# EAGLE board SNES and NES Dumper (EAGLE 9.6.2)
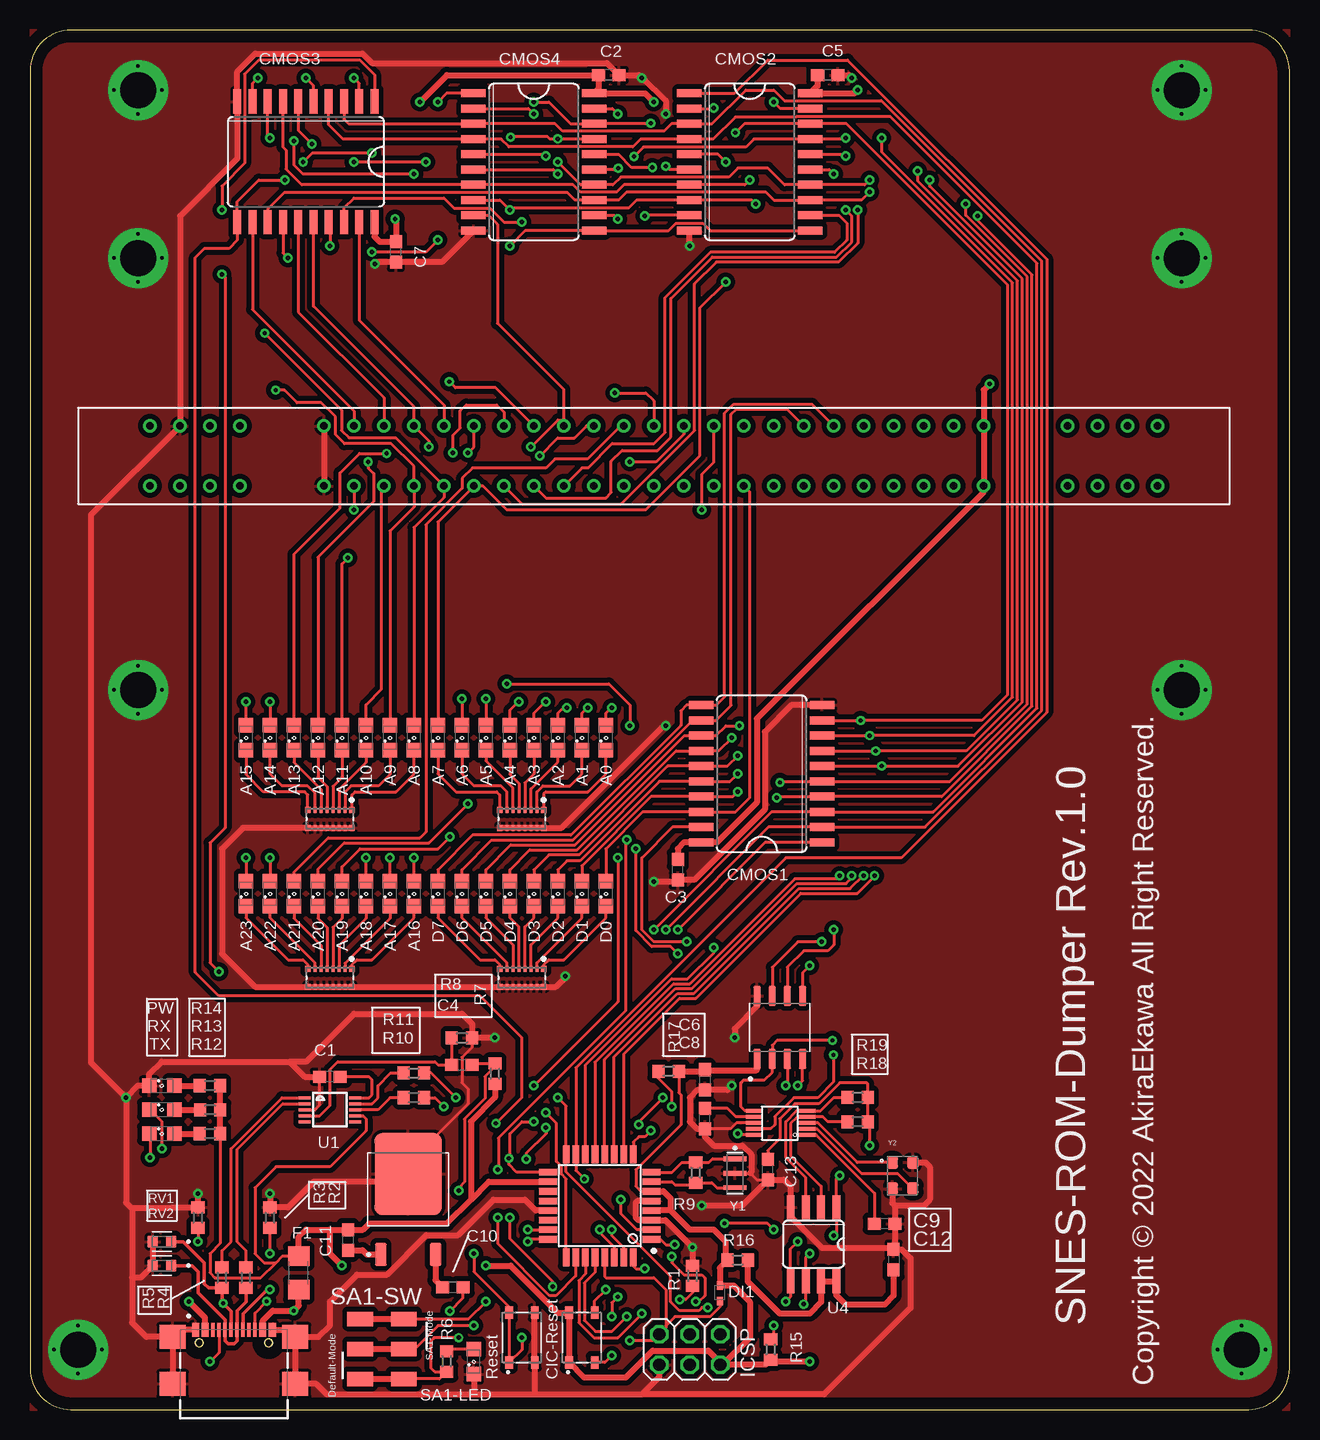
[diagram p0: board, top side]
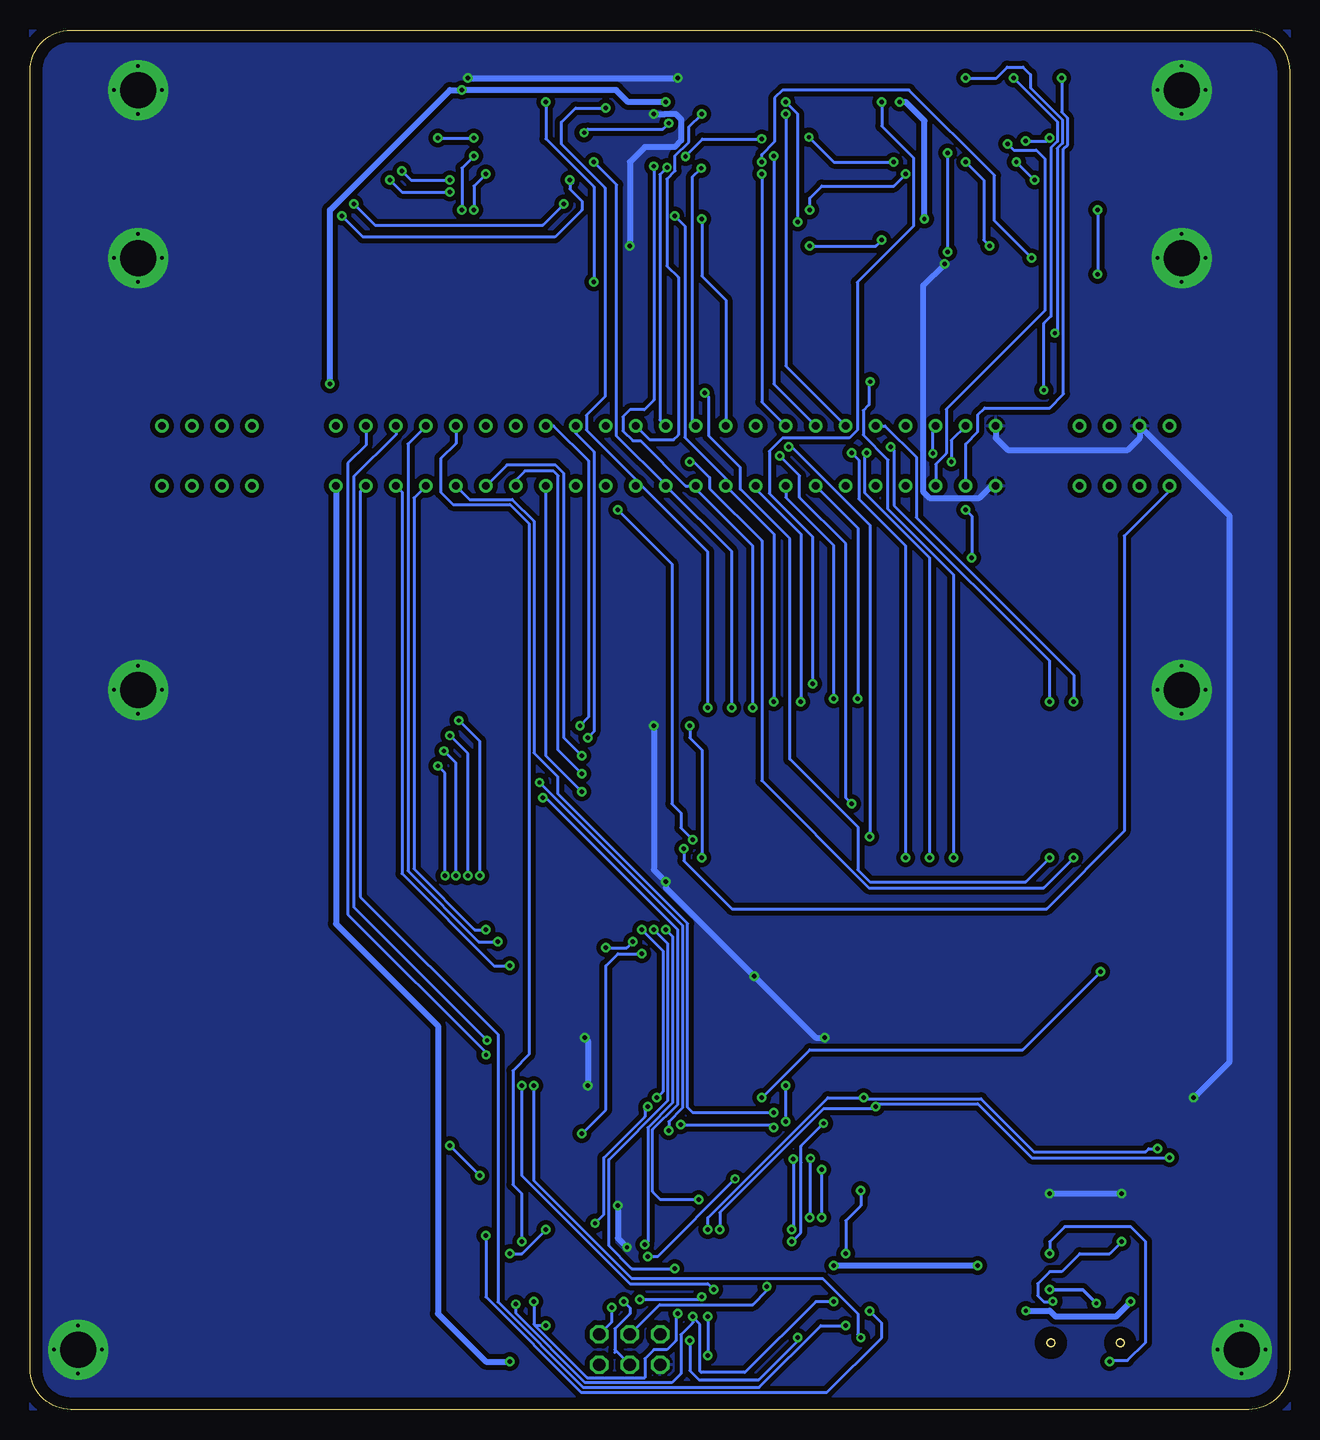
[diagram p1: board, bottom side, seen from below]

Size 105 x 115 mm. Coordinates in mm from the lower left corner, seen from the top.
Outline: 13.79,5.54 arc172 14.44,5.54 14.44,5.58 arc172 13.79,5.58 13.79,5.54
Outline: 19.57,5.54 arc172 20.21,5.54 20.21,5.58 arc172 19.57,5.58 19.57,5.54
Outline: 0,111.59 0,3.41 arc90 3.41,0 101.59,0 101.88,0.01 arc85 105,3.41 105,111.59 104.99,111.88 arc85 101.59,115 3.41,115 3.12,114.99 arc85 0,111.59
Copper layers (1*16): Top 0.035mm / dielectric 1.5mm / Bottom 0.035mm
Design rules "default *": minimum track width 6mil, minimum drill 0.35mm, track to track 6mil, track to pad 6mil, pad to pad 6mil, via to via 6mil, smd to smd 6mil, copper to edge 40mil, drill to drill 6mil, minimum pad ring 10mil, minimum via ring 8mil, stop-mask expansion 4mil, vias tented up to drill 0.4mm, thermal gap 10mil
Holes 0.65 mm at 14.11,5.56 19.89,5.56

## Footprints (pad centres in the part's own frame; a part is rotated, then mirrored left to right if it is on the bottom)
SML0805 = smd 1.2 x 1.2: A 1.05,0; C -1.05,0
C0603 = smd 1.1 x 1: 1 -0.85,0; 2 0.85,0
SO20W = smd 0.66 x 2.032: A1 -4.445,-5.029; A2 -3.175,-5.029; A3 -1.905,-5.029; A4 -0.635,-5.029; A5 0.635,-5.029; A6 1.905,-5.029; A7 3.175,-5.029; A8 4.445,-5.029; B1 -3.175,5.029; B2 -1.905,5.029; B3 -0.635,5.029; B4 0.635,5.029; B5 1.905,5.029; B6 3.175,5.029; B7 4.445,5.029; B8 5.715,5.029; DIR -5.715,-5.029; G -4.445,5.029; GND 5.715,-5.029; VCC -5.715,5.029
SO20W' = smd 0.66 x 2.032: CK 5.715,5.029; D1 -3.175,-5.029; D2 -1.905,-5.029; D3 1.905,-5.029; D4 3.175,-5.029; D5 3.175,5.029; D6 1.905,5.029; D7 -1.905,5.029; D8 -3.175,5.029; G -5.715,-5.029; GND 5.715,-5.029; Q1 -4.445,-5.029; Q2 -0.635,-5.029; Q3 0.635,-5.029; Q4 4.445,-5.029; Q5 4.445,5.029; Q6 0.635,5.029; Q7 -0.635,5.029; Q8 -4.445,5.029; VCC -5.715,5.029
CON = drill 0.6: 1 0,84; 2 0,81.5; 3 0,79; 4 0,76.5; 5 0,69.5; 6 0,67; 7 0,64.5; 8 0,62; 9 0,59.5; 10 0,57; 11 0,54.5; 12 0,52; 13 0,49.5; 14 0,47; 15 0,44.5; 16 0,42; 17 0,39.5; 18 0,37; 19 0,34.5; 20 0,32; 21 0,29.5; 22 0,27; 23 0,24.5; 24 0,22; 25 0,19.5; 26 0,17; 27 0,14.5; 28 0,7.5; 29 0,5; 30 0,2.5; 31 0,0; 32 5,84; 33 5,81.5; 34 5,79; 35 5,76.5; 36 5,69.5; 37 5,67; 38 5,64.5; 39 5,62; 40 5,59.5; 41 5,57; 42 5,54.5; 43 5,52; 44 5,49.5; 45 5,47; 46 5,44.5; 47 5,42; 48 5,39.5; 49 5,37; 50 5,34.5; 51 5,32; 52 5,29.5; 53 5,27; 54 5,24.5; 55 5,22; 56 5,19.5; 57 5,17; 58 5,14.5; 59 5,7.5; 60 5,5; 61 5,2.5; 62 5,0
SOD523 = smd 0.7 x 0.5: A 0.7,0; C -0.6,0
1206 = smd 1.6 x 1.8: 1 -1.4,0; 2 1.4,0
2X03 = drill 1.016 octagon: 1 -2.54,-1.27; 2 -2.54,1.27; 3 0,-1.27; 4 0,1.27; 5 2.54,-1.27; 6 2.54,1.27
GCT_USB4110-GF-A_REVB = smd 0.6 x 1.15: A1/B12 -3.2,1.075; A4/B9 -2.4,1.075; B1/A12 3.2,1.075; B4/A9 2.4,1.075 | smd 0.3 x 1.15: A5 -1.25,1.075; A6 -0.25,1.075; A7 0.25,1.075; A8 1.25,1.075; B5 1.75,1.075; B6 0.75,1.075; B7 -0.75,1.075; B8 -1.75,1.075 | smd 2.18 x 2: S1 -5.11,0.5; S2 5.11,0.5; S3 -5.11,-3.43; S4 5.11,-3.43 | hole 0.65: -2.89,0; 2.89,0
R0603 = smd 1 x 1.1: 1 -0.85,0; 2 0.85,0
PANASONIC_EXB-2HV101JV_0 = smd 0.425 x 0.5: 1 -1.837,-0.75; 8 1.837,-0.75; 9 1.837,0.75; 16 -1.837,0.75 | smd 0.25 x 0.5: 2 -1.25,-0.75; 3 -0.75,-0.75; 4 -0.25,-0.75; 5 0.25,-0.75; 6 0.75,-0.75; 7 1.25,-0.75; 10 1.25,0.75; 11 0.75,0.75; 12 0.25,0.75; 13 -0.25,0.75; 14 -0.75,0.75; 15 -1.25,0.75
VARC1608X56N = smd 0.87 x 1.02: 1 -0.78,0; 2 0.78,0
SW_SKRPACE010 = smd 1.05 x 0.65: 1 -2.075,1.075; 2 2.075,1.075; 3 -2.075,-1.075; 4 2.075,-1.075
ALPS_SSSS213202 = smd 1.2 x 2.15: P$1 0,0; P$2 2.5,0; P$3 5,0; P$4 5,3.65; P$5 2.5,3.65; P$6 0,3.65
MSOP10 = smd 1 x 0.25: 1 -2.113,1; 2 -2.113,0.5; 3 -2.113,0; 4 -2.113,-0.5; 5 -2.113,-1; 6 2.113,-1; 7 2.113,-0.5; 8 2.113,0; 9 2.113,0.5; 10 2.113,1
QFP80P900X900X120-32N = smd 1.5 x 0.55: 1 -4.3,2.8; 2 -4.3,2; 3 -4.3,1.2; 4 -4.3,0.4; 5 -4.3,-0.4; 6 -4.3,-1.2; 7 -4.3,-2; 8 -4.3,-2.8; 17 4.3,-2.8; 18 4.3,-2; 19 4.3,-1.2; 20 4.3,-0.4; 21 4.3,0.4; 22 4.3,1.2; 23 4.3,2; 24 4.3,2.8 | smd 0.55 x 1.5: 9 -2.8,-4.3; 10 -2,-4.3; 11 -1.2,-4.3; 12 -0.4,-4.3; 13 0.4,-4.3; 14 1.2,-4.3; 15 2,-4.3; 16 2.8,-4.3; 25 2.8,4.3; 26 2,4.3; 27 1.2,4.3; 28 0.4,4.3; 29 -0.4,4.3; 30 -1.2,4.3; 31 -2,4.3; 32 -2.8,4.3
DPAK228P968X238-4N = smd 0.96 x 1.9: 1 -2.28,-4.59; 3 2.28,-4.59 | smd 5.63 x 6.84: 2 0,2.12
SOIC-8 = smd 0.66 x 2.032: 1 -1.905,-3.073; 2 -0.635,-3.073; 3 0.635,-3.073; 4 1.905,-3.073; 5 1.905,3.073; 6 0.635,3.073; 7 -0.635,3.073; 8 -1.905,3.073
SOIC127P600X175-8N = smd 1.65 x 0.61: 1 -2.63,1.905; 2 -2.63,0.635; 3 -2.63,-0.635; 4 -2.63,-1.905; 5 2.63,-1.905; 6 2.63,-0.635; 7 2.63,0.635; 8 2.63,1.905
SI5351A-B-GTR = smd 1.4 x 0.3: CLK0 4.4,2; CLK1 4.4,1.5; CLK2 4.4,0; GND 4.4,1; SCL 0,0.5; SDA 0,0; VDD 0,2; VDDO 4.4,0.5; XA 0,1.5; XB 0,1
OSC_CSTCE16M0V53-R0 = smd 0.4 x 1.9: 1 -1.2,0; 2 0,0; 3 1.2,0
OSCSC320X250X100N = smd 0.98 x 1.1: 1 -0.85,1.1; 2 -0.85,-1.1; 3 0.85,-1.1; 4 0.85,1.1

## Placement (x,y rotation side)
A0  YELLOW  [SML0805]  48,56 90 top
A1  YELLOW  [SML0805]  46,56 90 top
A2  YELLOW  [SML0805]  44,56 90 top
A3  YELLOW  [SML0805]  42,56 90 top
A4  YELLOW  [SML0805]  40,56 90 top
A5  YELLOW  [SML0805]  38,56 90 top
A6  YELLOW  [SML0805]  36,56 90 top
A7  YELLOW  [SML0805]  34,56 90 top
A8  YELLOW  [SML0805]  32,56 90 top
A9  YELLOW  [SML0805]  30,56 90 top
A10  YELLOW  [SML0805]  28,56 90 top
A11  YELLOW  [SML0805]  26,56 90 top
A12  YELLOW  [SML0805]  24,56 90 top
A13  YELLOW  [SML0805]  22,56 90 top
A14  YELLOW  [SML0805]  20,56 90 top
A15  YELLOW  [SML0805]  18,56 90 top
A16  YELLOW  [SML0805]  32,43 90 top
A17  YELLOW  [SML0805]  30,43 90 top
A18  YELLOW  [SML0805]  28,43 90 top
A19  YELLOW  [SML0805]  26,43 90 top
A20  YELLOW  [SML0805]  24,43 90 top
A21  YELLOW  [SML0805]  22,43 90 top
A22  YELLOW  [SML0805]  20,43 90 top
A23  YELLOW  [SML0805]  18,43 90 top
C1  0.1u  [C0603]  25,27.75 180 top
C2  0.1u  [C0603]  48.25,111.25 180 top
C3  0.1u  [C0603]  54,45 90 top
C4  0.1u  [C0603]  36,28.75 0 top
C5  0.1u  [C0603]  66.51,111.25 180 top
C6  100n  [C0603]  56.25,27.49 270 top
C7  0.1u  [C0603]  30.5,96.5 90 top
C8  0.1u  [C0603]  56.25,24.25 90 top
C9  0.1u  [C0603]  71.25,15.49 180 top
C10  2.2u  [C0603]  35.25,10.2 0 top
C11  0.33u  [C0603]  26.5,14.13 270 top
C12  0.1u  [C0603]  71.99,12.5 270 top
C13  0.1u  [C0603]  61.5,20 90 top
CIC_START  GREEN  [SML0805]  36.99,4 90 top
CMOS1  TC74HC245AF  [SO20W]  61,53 90 top
CMOS2  TC74HC377AF  [SO20W']  60,104 270 top
CMOS3  TC74HC377AF  [SO20W']  23,104.01 180 top
CMOS4  TC74HC377AF  [SO20W']  42,104 270 top
CONNECTOR1  SNES-CARD-CONNECTOR  [CON]  94,77 90 top
D0  YELLOW  [SML0805]  48,43 90 top
D1  YELLOW  [SML0805]  46,43 90 top
D2  YELLOW  [SML0805]  44,43 90 top
D3  YELLOW  [SML0805]  42,43 90 top
D4  YELLOW  [SML0805]  40,43 90 top
D5  YELLOW  [SML0805]  38,43 90 top
D6  YELLOW  [SML0805]  36,43 90 top
D7  YELLOW  [SML0805]  34,43 90 top
DI1  1SS400TE61  [SOD523]  57.5,9.75 270 top
F1  13.2V/500mA  [1206]  22.4,11.4 90 top
ICSP  ICSP_328P  [2X03]  55,5 180 top
J2  USB4110-GF-A_REVB  [GCT_USB4110-GF-A_REVB]  17,5.56 0 top
PW  GREEN  [SML0805]  11,26.99 0 top
R1  10k  [R0603]  55.23,11.15 90 top
R2  5.1k  [R0603]  20,16 90 top
R3  5.1k  [R0603]  14,16 90 top
R4  22  [R0603]  18,11 90 top
R5  22  [R0603]  16,11 90 top
R6  1k  [R0603]  34.74,4.01 90 top
R7  10k  [R0603]  38.76,28 270 top
R8  10k  [R0603]  36.01,30.98 180 top
R9  1M  [R0603]  55.5,19.75 90 top
R10  1k  [R0603]  32,26 180 top
R11  1k  [R0603]  32,28.06 180 top
R12  1k  [R0603]  15,23 180 top
R13  1k  [R0603]  15.02,24.99 180 top
R14  1k  [R0603]  15,27 180 top
R15  1k  [R0603]  61.75,5 90 top
R16  200k  [R0603]  59,12.46 0 top
R17  1k  [R0603]  53.24,28.2 180 top
R18  1k  [R0603]  69,23.99 0 top
R19  1k  [R0603]  69,26.02 0 top
RN1  PANASONIC_EXB-2HV101JVPANASONIC_EXB-2HV101JV_0_0  [PANASONIC_EXB-2HV101JV_0]  41,36 180 top
RN2  PANASONIC_EXB-2HV101JVPANASONIC_EXB-2HV101JV_0_0  [PANASONIC_EXB-2HV101JV_0]  25,49.25 180 top
RN3  PANASONIC_EXB-2HV101JVPANASONIC_EXB-2HV101JV_0_0  [PANASONIC_EXB-2HV101JV_0]  41,49.25 180 top
RN4  PANASONIC_EXB-2HV101JVPANASONIC_EXB-2HV101JV_0_0  [PANASONIC_EXB-2HV101JV_0]  25,36 180 top
RV1  CG0603MLC-05E  [VARC1608X56N]  11,14 180 top
RV2  CG0603MLC-05E  [VARC1608X56N]  11,12 180 top
RX  YELLOW  [SML0805]  11,25 0 top
S1  SKRPACE010  [SW_SKRPACE010]  46,6 90 top
S2  SKRPACE010  [SW_SKRPACE010]  41,6 90 top
SW2  ALPS_SSSS213202  [ALPS_SSSS213202]  27.52,7.55 270 top
TX  YELLOW  [SML0805]  11,23 0 top
U1  CH340E  [MSOP10]  25,25 0 top
U2  ATMEGA328P-AU  [QFP80P900X900X120-32N]  47.5,16.99 180 top
U3  NJM2845DL1-33-TE1  [DPAK228P968X238-4N]  31.53,17.51 0 top
U4  PCA9306-SOIC8  [SOIC-8]  65.32,13.78 180 top
U5  PIC12F629-I/SN  [SOIC127P600X175-8N]  62.51,31.85 90 top
XTAL1  SI5351  [SI5351A-B-GTR]  64.77,24.9 180 top
Y1  CSTCE16M0V53-R0  [OSC_CSTCE16M0V53-R0]  58.77,19.7 270 top
Y2  FA-128 25.0000MHz 8 +10.0-10.0  [OSCSC320X250X100N]  72.74,19.5 0 top

## Library data of the parts
A0 A1-A23 CIC_START D0 D1-D7 PW RX TX = led
C1-C13 = rcl; SPICEPREFIX: C
CMOS1 = TC74HC245AF
CMOS2-CMOS4 = TC74HC377AF
CONNECTOR1 = SNES-CONNECTOR
DI1 = diode
F1 = SparkFun-Fuses; PROD_ID: RES-11150
ICSP = pinhead
J2 = USB4110-GF-A_REVB; AVAILABILITY: In Stock; DESCRIPTION: USB-C (USB TYPE-C) USB 2.0 Receptacle Connector 24 (16+8 Dummy) Position Surface Mount, Right Angle; Through Hole; MF: GCT; MP: USB4110-GF-A; PACKAGE: None; PRICE: None; PURCHASE-URL: https://pricing.snapeda.com/search/part/USB4110-GF-A/?ref=eda
R1-R19 = rcl; SPICEPREFIX: R
RN1-RN4 = Panasonic - EXB-2HV101JV; AUTOMOTIVE: Yes; AUTOMOTIVE_GRADE: Grade 1; CENTROID_NOT_SPECIFIED: No; COMPOSITION: Thick Film; DATASHEET: https://industrial.panasonic.com/cdbs/www-data/pdf/AOC0000/AOC0000C14.pdf; DEVICE_CLASS_L1: Passive Components; DEVICE_CLASS_L2: Resistors; DEVICE_CLASS_L3: Resistor Arrays; DIGIKEY_DESCRIPTION: RES ARRAY 8 RES 100 OHM 1506; DIGIKEY_PART_NUMBER: Y1101CT-ND; FOOTPRINT_VARIANT_NAME_0: Recommended_Land_Pattern; HEIGHT: 0.55mm; LEAD_FREE: Yes; MF: Panasonic; MFG_PACKAGE_IDENT: EXB2HV; MFG_PACKAGE_IDENT_COMPONENT_ID: d9f61f0f8aa83a95; MFG_PACKAGE_IDENT_DATE: 0; MFG_PACKAGE_IDENT_REV: 0; MOUSER_DESCRIPTION: Resistor Networks & Arrays 100 OHM 5%; MOUSER_PART_NUMBER: 667-EXB-2HV101JV; MPN: EXB-2HV101JV; NUMBER_OF_RESISTORS: 8; PACKAGE: 1506; POWER_PER_RESISTOR: 0.063W; POWER_RATING: 0.25W; PREFIX: RN; RESISTANCE: 100Ω; ROHS: Yes; SERIES: EXB; TEMPERATURE_COEFFICIENT: 200ppm/°C; TEMPERATURE_RANGE_HIGH: +125°C; TEMPERATURE_RANGE_LOW: -55°C; TERMINATION: Convex; TOLERANCE: 5%; VERIFICATION_VERSION: 0.0.0.3; VOLTAGE_RATING: 25V
RV1 RV2 = CG0603MLC-05E; AVAILABILITY: In Stock; DESCRIPTION: Varistor 1 Circuit Surface Mount, MLCV 0603 (1608 Metric); MF: Bourns; MP: CG0603MLC-05E; PACKAGE: 0603 Bourns Inc.; PRICE: None; PURCHASE-URL: https://pricing.snapeda.com/search/part/CG0603MLC-05E/?ref=eda
S1 S2 = SKRPACE010; AVAILABILITY: In Stock; DESCRIPTION: Switch Tactile N.O. SPST Button J-Bend 0.05A 16VDC 2.55N SMD Automotive T/R; MF: ALPS; MP: SKRPACE010; PACKAGE: None; PRICE: None
SW2 = ALPS_SSSS213202
U1 = CH340E; AVAILABILITY: Not in stock; DESCRIPTION: USB to serial chip CH340; MF: WCH; MP: CH340E; PACKAGE: Package; PRICE: None
U2 = ATMEGA328P-AU; AVAILABILITY: In Stock; DESCRIPTION: AVR AVR® ATmega Microcontroller IC 8-Bit 20MHz 32KB (16K x 16) FLASH 32-TQFP (7x7); MF: Microchip Technology; MP: ATMEGA328P-AU; PACKAGE: TQFP-32 Microchip; PRICE: None; PURCHASE-URL: https://pricing.snapeda.com/search/part/ATMEGA328P-AU/?ref=eda
U3 = NJM2845DL1-33-TE1; AVAILABILITY: In Stock; DESCRIPTION: Linear Voltage Regulator IC 1 Output 800mA TO-252-3; MF: NJR Corporation/NJRC; MP: NJM2845DL1-33-TE1; PACKAGE: TO-252-3 New Japan Radio; PRICE: None; PURCHASE-URL: https://pricing.snapeda.com/search/part/NJM2845DL1-33-TE1/?ref=eda
U4 = srg
U5 = PIC12F629-I_SN; AVAILABILITY: In Stock; DESCRIPTION: PIC PIC® 12F Microcontroller IC 8-Bit 20MHz 1.75KB (1K x 14) FLASH 8-SOIC; MF: Microchip; MP: PIC12F629-I/SN; PACKAGE: SOIC-8 Microchip; PRICE: None; PURCHASE-URL: https://pricing.snapeda.com/search/part/PIC12F629-I/SN/?ref=eda
XTAL1 = SI5351
Y1 = CSTCE16M0V53-R0; AVAILABILITY: Not in stock; DESCRIPTION: 16MHz Ceramic Resonator Built in Capacitor 15pF ±0.3% -20°C ~ 80°C Surface Mount; MF: Murata; MP: CSTCE16M0V53-R0; PACKAGE: SMD-3 Murata; PRICE: None
Y2 = ABM8X-102-32.000MHZ-T; AVAILABILITY: In Stock; DESCRIPTION: 32 MHz ±10ppm Crystal 10pF 60 Ohms 4-SMD, No Lead; MF: Abracon; MP: ABM8X-102-32.000MHZ-T; PACKAGE: SMD-4 Abracon; PRICE: None; PURCHASE-URL: https://pricing.snapeda.com/search/part/ABM8X-102-32.000MHZ-T/?ref=eda

## Nets
3V3: C10.2 C13.2 R18.2 R19.2 U4.1
A0: A0.A CMOS2.Q1 CONNECTOR1.17
A1: A1.A CMOS2.Q2 CONNECTOR1.16
A2: A2.A CMOS2.Q3 CONNECTOR1.15
A3: A3.A CMOS2.Q4 CONNECTOR1.14
A4: A4.A CMOS2.Q5 CONNECTOR1.13
A5: A5.A CMOS2.Q6 CONNECTOR1.12
A6: A6.A CMOS2.Q7 CONNECTOR1.11
A7: A7.A CMOS2.Q8 CONNECTOR1.10
A8: A8.A CMOS3.Q1 CONNECTOR1.9
A9: A9.A CMOS3.Q2 CONNECTOR1.8
A10: A10.A CMOS3.Q3 CONNECTOR1.7
A11: A11.A CMOS3.Q4 CONNECTOR1.6
A12: A12.A CMOS3.Q5 CONNECTOR1.37
A13: A13.A CMOS3.Q6 CONNECTOR1.38
A14: A14.A CMOS3.Q7 CONNECTOR1.39
A15: A15.A CMOS3.Q8 CONNECTOR1.40
A16: A16.A CMOS4.Q1 CONNECTOR1.41
A17: A17.A CMOS4.Q2 CONNECTOR1.42
A18: A18.A CMOS4.Q3 CONNECTOR1.43
A19: A19.A CMOS4.Q4 CONNECTOR1.44
A20: A20.A CMOS4.Q5 CONNECTOR1.45
A21: A21.A CMOS4.Q6 CONNECTOR1.46
A22: A22.A CMOS4.Q7 CONNECTOR1.47
A23: A23.A CMOS4.Q8 CONNECTOR1.48
CIC_CLK: CONNECTOR1.56 U5.2 XTAL1.CLK2
CIC_I/O_0: CONNECTOR1.55 U5.7
CIC_I/O_1: CONNECTOR1.24 U5.6
CIC_RST: CONNECTOR1.25 U5.5
CLK: CONNECTOR1.1 XTAL1.CLK0
CPU_CLK: CONNECTOR1.57 XTAL1.CLK1
D0: CMOS1.B1 CONNECTOR1.19 D0.A
D1: CMOS1.B2 CONNECTOR1.20 D1.A
D2: CMOS1.B3 CONNECTOR1.21 D2.A
D3: CMOS1.B4 CONNECTOR1.22 D3.A
D4: CMOS1.B5 CONNECTOR1.50 D4.A
D5: CMOS1.B6 CONNECTOR1.51 D5.A
D6: CMOS1.B7 CONNECTOR1.52 D6.A
D7: CMOS1.B8 CONNECTOR1.53 D7.A
D+: R5.2 U1.1
D-: R4.2 U1.2
DN1: J2.A7 J2.B7 R4.1 RV2.1
DP1: J2.A6 J2.B6 R5.1 RV1.1
GND: C1.2 C2.1 C3.1 C5.1 C6.2 C7.1 C8.1 C9.1 C12.1 C13.1 CIC_START.C CMOS1.GND CMOS2.GND CMOS3.GND CMOS4.GND CONNECTOR1.5 CONNECTOR1.33 CONNECTOR1.36 ICSP.6 J2.A1/B12 J2.B1/A12 J2.S1 J2.S2 J2.S3 J2.S4 PW.C R1.2 R2.2 R3.2 R8.1 RN1.9 RN1.10 RN1.11 RN1.12 RN1.13 RN1.14 RN1.15 RN1.16 RN2.9 RN2.10 RN2.11 RN2.12 RN2.13 RN2.14 RN2.15 RN2.16 RN3.9 RN3.10 RN3.11 RN3.12 RN3.13 RN3.14 RN3.15 RN3.16 RN4.9 RN4.10 RN4.11 RN4.12 RN4.13 RN4.14 RN4.15 RN4.16 RV1.2 RV2.2 S2.3 S2.4 U1.3 U2.3 U2.5 U2.21 U3.2 U4.4 U5.8 XTAL1.GND Y1.2 Y2.2 Y2.4
MISO_D12: CMOS3.G ICSP.1 U2.16
MOSI_D11: CMOS2.G ICSP.4 U2.15
N$1: C1.1 U1.10
N$2: R11.2 U1.9
N$3: R10.2 U1.8
N$4: D0.C RN1.1
N$5: PW.A R14.2
N$6: D1.C RN1.2
N$7: D2.C RN1.3
N$8: D3.C RN1.4
N$9: D4.C RN1.5
N$10: D5.C RN1.6
N$11: D6.C RN1.7
N$12: D7.C RN1.8
N$13: A8.C RN2.1
N$14: A9.C RN2.2
N$15: A10.C RN2.3
N$16: A11.C RN2.4
N$17: A12.C RN2.5
N$18: A13.C RN2.6
N$19: A14.C RN2.7
N$20: A15.C RN2.8
N$21: R12.2 TX.A
N$22: J2.B5 R3.1
N$23: J2.A5 R2.1
N$24: A0.C RN3.1
N$25: A1.C RN3.2
N$26: A2.C RN3.3
N$27: A3.C RN3.4
N$28: A4.C RN3.5
N$29: A5.C RN3.6
N$30: A6.C RN3.7
N$31: A7.C RN3.8
N$32: A16.C RN4.1
N$33: A17.C RN4.2
N$34: A18.C RN4.3
N$35: A19.C RN4.4
N$36: A20.C RN4.5
N$37: A21.C RN4.6
N$38: A22.C RN4.7
N$39: A23.C RN4.8
N$40: XTAL1.XA Y2.3
N$41: XTAL1.XB Y2.1
N$42: R13.2 RX.A
N$43: C10.1 U3.3
N$44: C11.2 U3.1
N$45: CIC_START.A R6.2
N$47: S1.4 U5.4
N$48: R1.1 S1.3
RESET: C4.2 DI1.A ICSP.5 R7.1 S2.1 S2.2 U2.29
RST: CONNECTOR1.26 SW2.P$2 SW2.P$5
RST_SW: R6.1 SW2.P$3 SW2.P$4 U5.3
RTS: C4.1 R8.2 U1.4
RX: R11.1 RX.C U2.31
SCK_D13: CMOS4.G ICSP.3 U2.17
SCL_1: R18.1 U4.2 XTAL1.SCL
SDA_1: R19.1 U4.3 XTAL1.SDA
TX: R10.1 TX.C U2.30
U2_A0: CMOS1.DIR U2.23
U2_A1: CMOS2.CK CMOS3.CK CMOS4.CK U2.24
U2_A2: CONNECTOR1.23 U2.25
U2_A3: CONNECTOR1.49 U2.26
U2_A4: CONNECTOR1.54 R15.2 U2.27 U4.5
U2_A5: R17.2 SW2.P$1 SW2.P$6 U2.28 U4.6
U2_D2: CMOS1.A1 CMOS2.D1 CMOS3.D1 CMOS4.D1 U2.32
U2_D3: CMOS1.A2 CMOS2.D2 CMOS3.D2 CMOS4.D2 U2.1
U2_D4: CMOS1.A3 CMOS2.D3 CMOS3.D3 CMOS4.D3 U2.2
U2_D5: CMOS1.A4 CMOS2.D4 CMOS3.D4 CMOS4.D4 U2.9
U2_D6: CMOS1.A5 CMOS2.D5 CMOS3.D5 CMOS4.D5 U2.10
U2_D7: CMOS1.A6 CMOS2.D6 CMOS3.D6 CMOS4.D6 U2.11
U2_D8: CMOS1.A7 CMOS2.D7 CMOS3.D7 CMOS4.D7 U2.12
U2_D9: CMOS1.A8 CMOS2.D8 CMOS3.D8 CMOS4.D8 U2.13
U2_D10: CMOS1.G U2.14
VBUS: F1.1 J2.A4/B9 J2.B4/A9
VCC: C2.2 C3.2 C5.2 C6.1 C7.2 C11.1 CMOS1.VCC CMOS2.VCC CMOS3.VCC CMOS4.VCC CONNECTOR1.27 CONNECTOR1.58 DI1.C F1.2 ICSP.2 R7.2 R12.1 R13.1 R14.1 R15.1 R16.1 R17.1 S1.1 S1.2 U1.7 U2.4 U2.6 U2.18 U5.1
VDD: C9.2 XTAL1.VDD
VDDO: C8.2 XTAL1.VDDO
VREF2: C12.2 R16.2 U4.7 U4.8
XTAL_1: R9.1 U2.7 Y1.3
XTAL_2: R9.2 U2.8 Y1.1

## Tracks (layer width: path | path; a pad name or v marks a point on that pad's centre or on a via)
3V3  (via drill 0.35)
  Top 0.254: C13.2 61.5,21.6 62.5,22.6 62.5,24.25 63.75,25.5 65.75,25.5 67.5,27.25 69.75,27.25 69.85,27.15 R19.2 R18.2 70,23.84 v70,22 | v67.5,19.5 67.22,19.23 U4.1 67.22,14.72 v67,14.5 | v35,8.21 36.1,9.31 C10.2
  Bottom 0.254: v67.5,19.5 v70,22 | v67,14.5 67,9.38 59.05,1.44 38.56,1.44 34,6 34,7.21 v35,8.21
A0  (via drill 0.35)
  Top 0.254: CMOS2.Q1 57,108.44 v57,108.5 | A0.A 48,58.05 48.45,58.5 v48.5,58.5
  Bottom 0.254: v57,108.5 59.51,108.5 60.69,107.32 60.69,105.48 57.06,101.85 57.06,84.44 58.61,82.89 58.61,81.65 54.5,77.54 CONNECTOR1.17 54,77 48.5,71.5 v48.5,58.5
A1  (via drill 0.35)
  Top 0.254: v58,104 57.37,104.64 CMOS2.Q2 | v46.5,58.5 46.45,58.5 46,58.05 A1.A
  Bottom 0.254: v58,104 56.09,102.09 56.09,81.14 52,77.05 CONNECTOR1.16 51.98,77 46.5,71.52 v46.5,58.5
A2  (via drill 0.35)
  Top 0.254: CMOS2.Q3 53.28,103.36 v53,103.65 | A2.A 44,58.05 44.45,58.5 v44.75,58.5
  Bottom 0.254: v53,103.65 v52.99,103.64 52.99,84.15 53.79,83.35 54.99,83.35 55.57,82.77 55.57,81.58 54.75,80.76 54.1,80.76 50.34,77 CONNECTOR1.15 49.5,76.75 44.75,72 v44.75,58.5
A3  (via drill 0.35)
  Top 0.254: CMOS2.Q4 51.3,99.56 v51.25,99.5 | v43,59 42.95,59 42,58.05 A3.A
  Bottom 0.254: v51.25,99.5 50.41,98.66 50.41,81.03 47,77.61 CONNECTOR1.14 43,73 v43,59
A4  (via drill 0.35)
  Top 0.254: CMOS2.Q5 67.44,99.56 68.09,98.91 68.09,97.49 67.07,96.47 56.72,96.47 52.95,92.7 52.95,81.45 52.03,80.53 48.53,80.53 46.5,78.5 46,78.5 CONNECTOR1.13 | v40.75,59 40.7,59 40,58.3 A4.A
  Bottom 0.254: CONNECTOR1.13 44.5,76.75 40.75,73 v40.75,59
A5  (via drill 0.35)
  Top 0.254: CMOS2.Q6 66.64,103.36 v67,103 | CONNECTOR1.12 43,76 48,76 48.45,76.45 48.45,79.04 49.35,79.95 52.3,79.95 53.44,81.08 53.44,92.62 56.88,96.06 67.24,96.06 68.5,97.33 68.5,99.5 v68,100 | v38,59.25 A5.A
  Bottom 0.254: v67,103 68,102 v68,100 | CONNECTOR1.12 42,76.04 38,72.04 v38,59.25
A6  (via drill 0.35)
  Top 0.254: CMOS2.Q7 67.86,104.64 v68,104.5 | v69,100 69,97.25 67.41,95.66 57.23,95.66 55.4,93.83 55.4,81.62 49.28,75.5 41,75.5 CONNECTOR1.11 | v36,59.25 A6.A
  Bottom 0.254: v68,104.5 69,103.5 v69,100 | CONNECTOR1.11 36,73.5 v36,59.25
A7  (via drill 0.35)
  Top 0.254: CMOS2.Q8 62.55,108.44 v62,109 | v58,94 55.84,91.84 55.84,79.54 51.3,75 39.75,75 37.75,77 CONNECTOR1.10 34,74 A7.A
  Bottom 0.254: v62,109 62,105.92 58,101.92 v58,94
A8  (via drill 0.35)
  Top 0.254: CMOS3.Q1 27.45,110.56 v27,111 | v19.56,89.73 25.97,83.32 25.97,81.62 26.59,81.01 30.49,81.01 CONNECTOR1.9 34.5,76.04 32,73.54 A8.A
  Bottom 0.254: v27,111 24.43,111 23.52,111.91 22.23,111.91 21.59,111.27 21.59,110.17 18.94,107.51 18.94,105.56 19.36,105.14 19.36,89.93 v19.56,89.73
A9  (via drill 0.35)
  Top 0.254: CMOS3.Q2 23.64,110.36 v23,111 | v20.47,84.97 21.22,84.97 22.25,83.94 24.29,83.94 25.46,82.77 25.46,81.28 26.22,80.52 30.11,80.52 32,78.64 CONNECTOR1.8 32,75.25 30,73.25 A9.A
  Bottom 0.254: v23,111 19.34,107.34 19.34,105.73 19.88,105.19 19.88,91.14 20.47,90.55 v20.47,84.97
A10  (via drill 0.35)
  Top 0.254: CMOS3.Q3 22.36,106.64 v23.5,105.5 | CONNECTOR1.7 29.28,76.78 29.28,60.02 28,58.74 A10.A
  Bottom 0.254: v23.5,105.5 23,105 21.12,105 20.41,104.29 20.41,91.59 28.62,83.38 28.62,79.69 29.5,78.81 CONNECTOR1.7
A11  (via drill 0.35)
  Top 0.254: CMOS3.Q4 18.55,110.56 v19,111 | A11.A 26,70.5 v26.5,71 | CONNECTOR1.6 v27,75
  Bottom 0.254: v19,111 19,108.15 18.53,107.68 18.53,105.39 18.84,105.08 18.84,84.67 20,83.5 25.41,83.5 25.98,82.93 25.98,81.52 27,80.5 CONNECTOR1.6 | v27,75 26.5,74.5 v26.5,71
A12  (via drill 0.35)
  Top 0.254: CMOS3.Q5 18.55,91.69 27,83.25 CONNECTOR1.37 | v28.19,79 28.19,78.5 28.66,78.03 28.66,75.71 24,71.05 A12.A
  Bottom 0.254: CONNECTOR1.37 28.19,80.81 v28.19,79
A13  (via drill 0.35)
  Top 0.254: CONNECTOR1.38 29.5,84.35 22.36,91.48 CMOS3.Q6 | A13.A 22,71.3 25.84,75.14 25.84,78.08 27.46,79.7 v29.74,79.7
  Bottom 0.254: v29.74,79.7 29.74,81.76 CONNECTOR1.38
A14  (via drill 0.35)
  Top 0.254: CMOS3.Q7 23.64,91.96 32,83.59 CONNECTOR1.39 33.25,80.75 v33.25,80.25 | v20,59 A14.A
  Bottom 0.254: v33.25,80.25 32.97,79.97 32.97,75.37 20,62.4 v20,59
A15  (via drill 0.35)
  Top 0.254: CMOS3.Q8 27.45,90.81 34.5,83.75 CONNECTOR1.40 | A15.A v18,59
  Bottom 0.254: 34.5,81.96 CONNECTOR1.40 33.71,82 31.12,79.41 31.12,74.37 18,61.25 v18,59
A16  (via drill 0.35)
  Top 0.254: CMOS4.Q1 41.55,108.44 v42,108 | A16.A v32,46 | v36.5,79.75 37,80.25 CONNECTOR1.41
  Bottom 0.254: v42,108 42,87 CONNECTOR1.41 | v32,46 32,72 35.91,75.91 35.91,79.16 v36.5,79.75
A17  (via drill 0.35)
  Top 0.254: CMOS4.Q2 42.87,104.64 v43,104.5 | A17.A v30,46 | v35.25,79.75 35.25,81.21 35.87,81.83 35.87,83.26 36.36,83.75 38.91,83.75 39.5,83.16 CONNECTOR1.42
  Bottom 0.254: v43,104.5 43,85.5 CONNECTOR1.42 | v30,46 30,71 35.4,76.4 35.4,79.6 v35.25,79.75
A18  (via drill 0.35)
  Top 0.254: CMOS4.Q3 43.63,103.36 v44,103 | A18.A v28,46 | v34.96,85.68 35.47,85.17 38.83,85.17 CONNECTOR1.43
  Bottom 0.254: v44,103 44,84 CONNECTOR1.43 | v28,46 28,69.58 33.47,75.05 33.47,79.16 35.54,81.23 35.54,83.28 35.06,83.76 35.06,85.58 v34.96,85.68
A19  (via drill 0.35)
  Top 0.254: CMOS4.Q4 38.22,99.56 38.97,98.81 38.97,90.56 44.5,85.03 CONNECTOR1.44 44.5,82.5 44,82.5 v41.75,80.25 | A19.A 26,45.25 27.5,46.75 34,46.75 v35,47.75
  Bottom 0.254: v35,47.75 35,73.75 41.5,80.25 v41.75,80.25
A20  (via drill 0.35)
  Top 0.254: A20.A 24,45.05 26.2,47.25 33.25,47.25 v36.5,50.5 | v42.5,79.5 43.99,80.99 45.38,80.99 46.39,82 CONNECTOR1.45 | CMOS4.Q5 48.7,99.56 v49,99.25
  Bottom 0.254: v36.5,50.5 37,51 37,72.18 40.85,76.03 40.85,77.85 v42.5,79.5 | v49,99.25 49,94.5 47,92.5 CONNECTOR1.45
A21  (via drill 0.35)
  Top 0.254: v49.04,103.48 48.92,103.36 CMOS4.Q6 | A21.A 22,44.8 24.86,47.66 32.5,47.66 33,48.16 33,73.77 36.03,76.8 36.03,77.64 36.89,78.5 43,78.5 43.75,79.25 46.46,79.25 49.21,82 CONNECTOR1.46
  Bottom 0.254: CONNECTOR1.46 49.8,82.3 49.8,102.72 v49.04,103.48
A22  (via drill 0.35)
  Top 0.254: CMOS4.Q7 47.05,104.61 49.09,104.61 50.16,103.54 v51.88,103.54 | v20,46 A22.A | v48.75,84.75 51.35,84.75 52,84.1 CONNECTOR1.47
  Bottom 0.254: v51.88,103.54 52.48,102.94 52.48,82.48 CONNECTOR1.47 | v20,46 22,44 35,44 36,45 36,48.57 41.66,54.23 41.66,72.59 45.79,76.72 45.79,78.54 48.42,81.17 48.42,84.42 v48.75,84.75
A23  (via drill 0.35)
  Top 0.254: CMOS4.Q8 48.55,108.44 v49,108 | CONNECTOR1.48 54.5,81.32 52.18,79 v50,79 | v18,46 A23.A
  Bottom 0.254: CONNECTOR1.48 53.34,80.84 51.35,80.84 50.95,81.23 50.95,94.38 51.91,95.33 51.91,102.58 51.22,103.27 51.22,104.52 50.08,105.66 50.08,106.92 v49,108 | v50,79 49.65,79 48.35,77.7 48.35,76.78 44,72.43 44,52.42 35.08,43.5 20.5,43.5 v18,46
CIC_CLK  (via drill 0.35)
  Top 0.254: XTAL1.CLK2 59.6,24.9 59.25,25.25 59.25,27.25 59.47,27.47 61.22,27.47 61.88,28.12 U5.2 61.88,30.38 62.27,30.77 v66.9,30.77
  Bottom 0.254: CONNECTOR1.56 74.5,81.27 78,77.77 78,41.88 v66.9,30.77
CIC_I/O_0  (via drill 0.35)
  Top 0.254: v66,39 64,39 61.88,36.88 U5.7
  Bottom 0.254: CONNECTOR1.55 73.5,80.5 73.5,44.9 67.6,39 v66,39
CIC_I/O_1  (via drill 0.35)
  Top 0.254: v67,40 67,38.75 66.5,38.25 64.5,38.25 63.15,36.9 U5.6
  Bottom 0.254: CONNECTOR1.24 73,76 73,45.08 67.92,40 v67,40
CIC_RST  (via drill 0.35)
  Top 0.254: v65,37 64.41,36.41 U5.5
  Bottom 0.254: CONNECTOR1.25 74,76.5 74,44.67 66.33,37 v65,37
CLK  (via drill 0.35)
  Top 0.254: XTAL1.CLK0 59.1,22.9 v59,23 | v54,38 53.41,38.59 51.83,38.59 50.5,39.92 v50.5,46.75
  Bottom 0.254: v59,23 57,25 57,37 56,38 v54,38 | v50.5,46.75 50.5,45.75 46.5,41.75 20.25,41.75 13.78,48.22 13.78,72.82 10,76.6 CONNECTOR1.1
CPU_CLK  (via drill 0.35)
  Top 0.254: v66.99,29.56 66.99,27.32 65.67,26 63.67,26 62.09,24.42 62.09,23.75 61.74,23.4 XTAL1.CLK1
  Bottom 0.254: CONNECTOR1.57 77,80.39 78.51,78.88 78.51,41.29 66.99,29.77 v66.99,29.56
D0
  Top 0.254: CONNECTOR1.19 59.99,76.51 59.99,50.99 58.83,49.83 CMOS1.B1 51.08,49.83 48,46.75 D0.A
D1  (via drill 0.35)
  Top 0.254: v59,51.5 58.59,51.09 CMOS1.B2 51.77,51.09 46,45.33 D1.A
  Bottom 0.254: v59,51.5 62,54.5 CONNECTOR1.20
D2  (via drill 0.35)
  Top 0.254: v59,53 58.37,52.37 CMOS1.B3 52.47,52.37 45.85,45.75 44.75,45.75 44,45 D2.A
  Bottom 0.254: v59,53 60.96,54.96 60.96,77.85 61.36,78.25 63.75,78.25 64.5,77.5 CONNECTOR1.21
D3  (via drill 0.35)
  Top 0.254: v59,54.5 58.13,53.63 CMOS1.B4 53.16,53.63 45.78,46.25 43.25,46.25 42,45 D3.A
  Bottom 0.254: v59,54.5 60.48,55.98 60.48,78.04 61.19,78.75 65.25,78.75 CONNECTOR1.22
D4  (via drill 0.35)
  Top 0.254: v58.5,56 57.41,54.91 CMOS1.B5 53.85,54.91 45.61,46.66 41.66,46.66 40,45 D4.A
  Bottom 0.254: CONNECTOR1.50 59.5,81.37 57.98,79.85 57.98,56.52 v58.5,56
D5  (via drill 0.35)
  Top 0.254: v59.16,57 58,57 57.17,56.17 CMOS1.B6 54.55,56.17 45.44,47.06 40.06,47.06 38,45 D5.A
  Bottom 0.254: v59.16,57 58.45,57.71 58.45,79.1 61.35,82 CONNECTOR1.51
D6
  Top 0.254: CONNECTOR1.52 63.1,83.4 58.88,83.4 58.45,82.97 58.45,58.7 57.2,57.45 CMOS1.B7 55.25,57.45 45.27,47.47 38.47,47.47 36,45 D6.A
D7
  Top 0.254: D7.A 34,45 36.88,47.88 45.1,47.88 54.25,57.02 54.25,58.25 54.72,58.72 CMOS1.B8 57.22,58.72 57.91,59.41 57.91,83.07 58.65,83.81 65.19,83.81 CONNECTOR1.53
D+
  Top 0.254: U1.1 21,26 16.75,21.75 16.75,14 16,13.25 R5.2
D-
  Top 0.254: R4.2 18,13.25 17.25,14 17.25,21.68 21.07,25.5 U1.2
DN1
  Top 0.305: R4.1 18,9 17.25,8.25 J2.A7 17.25,5.75 17,5.5 16.5,5.5 16.25,5.75 J2.B7 16.25,7.5 14.03,9.72 14.03,11.5 13.53,12 RV2.1
DP1  (via drill 0.35)
  Top 0.305: J2.A6 16.75,8.19 v16.09,8.85 16,8.94 R5.1 14.88,10.15 14.53,10.5 14.53,12.25 12.78,14 RV1.1 | J2.B6 17.75,8 19.75,10 v20,10
  Bottom 0.305: v20,10 17.25,10 v16.09,8.85
GND  (via drill 0.3, 0.35, 3 pad 5)
  Top 0.254: XTAL1.GND 58.9,23.9 58.4,23.4 C8.1 | R8.1 36.86,30.2 36.02,29.37 36.02,27.23 36.5,26.75 36.5,25.5 31.32,20.32 31.32,19.43 | Y1.2 60.05,19.7 60.6,19.15 C13.1 | U1.3 23.75,25 24.15,25.4 C1.2
  Top 0.508: v8,26 8.99,26.99 PW.C 9.95,27.99 10.96,29 21.65,29 | v8,26 8,17.25 8.47,16.78 | 21.65,29 22.9,27.75 C1.2 | U3.2 31.32,19.43 30.9,19 23.65,19 21.5,16.85 R2.2 v20,18 | S2.4 S2.3 42.08,1.34 42,1.27 | U4.4 63.41,17.59 | U2.5 50.64,17.39 50.5,17.25 50.5,16 50.71,15.79 U2.3 52.96,15.79 v55.23,13.52 R1.2 | 72.1,17 C9.1 72.1,13.46 | 72.1,13.46 C12.1 72.67,13.35 73.4,12.62 73.4,8.46 66.2,1.27 51,1.27 | v52,44 53.85,44 C3.1 55.4,44.15 61.25,50 61.25,56.5 63.47,58.72 CMOS1.GND | v38.75,31 38.73,30.98 R8.1 36.86,32.14 36,33 27,33 23,29 21.65,29 | U4.4 63.41,18.59 62.85,19.15 C13.1 59.35,17 v56,17 | 60.05,19.7 60.13,19.78 60.13,21.27 59.4,22 57,22 56.25,22.75 C8.1 55.6,23.4 55,24 55,26 55.64,26.64 C6.2 58.14,26.64 v58.5,27 | U5.8 60.6,33.6 58.75,31.75 v58.75,31 | U4.4 63.41,16.09 66.04,13.46 72.1,13.46 | CONNECTOR1.36 CONNECTOR1.5 | C5.1 68.25,111.25 v68.5,111 | CMOS4.GND 34.34,95.65 C7.1 28.75,95.65 v28.75,95.5 | U2.21 42.16,16.59 41.25,17.5 38.64,17.5 35.67,14.53 33.03,14.53 29.75,11.25 27.25,11.25 25,9 25,7 24.06,6.06 J2.S2 | 51,1.27 52.46,2.73 ICSP.6 | 37,1.27 24.73,1.27 23.87,2.13 J2.S4 J2.S2 | 37,1.27 42,1.27 | 42,1.27 51,1.27 | CIC_START.C 37,1.27 | v14,18 R3.2 11.85,16.85 11.78,16.78 8.47,16.78 | v53,108 53,109.11 51.11,111 v51,111 50.75,111.25 C2.1 48.1,112.25 28.5,112.25 27.72,113.03 18.78,113.03 17.29,111.53 CMOS3.GND 17.29,104.28 12.5,99.5 CONNECTOR1.33 5.09,74.59 5.09,28.91 v8,26 | v55,97 54.97,97.03 CMOS2.GND | v44.62,36.12 44.62,36.04 43.84,35.25 RN1.16 RN1.15 RN1.14 RN1.13 RN1.12 RN1.11 RN1.10 RN1.9 RN4.16 RN4.15 RN4.14 RN4.13 RN4.12 RN4.11 RN4.10 RN4.9 18.75,35.25 16,38 16,46.75 17.75,48.5 RN2.9 RN2.10 RN2.11 RN2.12 RN2.13 RN2.14 RN2.15 RN2.16
  Top 0.508: v53,57 52.83,57 44.33,48.5 RN3.16 RN3.15 RN3.14 RN3.13 RN3.12 RN3.11 RN3.10 RN3.9 | 8.47,16.78 8.5,16.75 8.5,11 | 8.5,11 8.5,7.25 9.69,6.06 J2.S1 11.89,6 | 11.89,6 J2.S3 | J2.B1/A12 21.54,6.63 J2.S2 | J2.A1/B12 12.53,6.63 11.89,6 | RV1.2 RV2.2 9.22,11 8.5,11 | Y2.4 74.65,20.6 75,20.25 75,17.5 74.5,17 72.1,17 | Y2.2 71.89,17.21 72.1,17
  Bottom 0.508: v38.75,31 39.5,31 v44.62,36.12 52,43.5 v52,44 53,45 v53,57 | v58.75,31 58.5,30.75 v58.5,27 | CONNECTOR1.36 24.5,81 23.5,80 13.5,80 12.5,81 CONNECTOR1.33 5,74.5 5,29 v8,26 | v68.5,111 v51,111 | v28.75,95.5 30.55,93.7 30.55,76.53 30.02,76 25.85,76 24.85,77 CONNECTOR1.5 | v56,17 56,14.29 v55.23,13.52 | v14,18 v20,18 | v53,108 52.08,108 52.08,108.01 51.17,108.01 50.72,107.55 50.72,105.78 51.25,105.25 53.75,105.25 55,104 v55,97
  other vias: 96,60 101,5 4,5 9,60 9,110 9,96 96,110 96,96 96,98 94,96 98,96 96,94 96,108 94,110 98,110 96,112 9,112 11,110 9,108 7,110 9,94 11,96 7,96 9,98 9,62 11,60 9,58 7,60 4,7 2,5 6,5 4,3 99,5 101,3 103,5 101,7 96,62 94,60 98,60 96,58
  pour Top (isolate 0.406): 0,21 0,0 6,0 105,0 105,4 105,115 100,115 0,115 0,105
  pour Bottom (isolate 0.406): 0,36 0,0 4,0 105,0 105,7 105,115 93,115 0,115 0,112
MISO_D12  (via drill 0.35)
  Top 0.254: v56.5,8.5 56,8.5 55.75,8.25 54.16,8.25 53.41,9 53.41,11.09 44.7,19.8 U2.16 44.7,25.3 v44,26 | CMOS3.G 28.71,111.28 27.5,112.5 19.07,112.5 17.89,111.33 17.89,103.89 16,102 v16,100 | v16,94.63 16.25,94.38 16.25,48.5 15,47.25 15,37.25 v15.75,36.5
  Bottom 0.254: ICSP.1 56.5,7.31 v56.5,8.5 | v44,26 40,30 22.25,30 v15.75,36.5 | v16,100 v16,94.63
MOSI_D11  (via drill 0.35)
  Top 0.254: v46.22,19.21 45.5,19.93 U2.15 45.5,28.5 63,46 72.63,46 84.75,58.12 84.75,95.9 68.15,112.5 61.5,112.5 58.72,109.72 CMOS2.G | v53.5,12.75 53.5,12.25 54.53,11.22 56,11.22 56.25,10.97 56.25,9.5 55.75,9 v55.5,9
  Bottom 0.254: v53.5,12.75 52.68,12.75 v46.22,19.21 | 56.25,5 56.25,6.75 55,8 55,8.5 v55.5,9 | 56.25,5 56.25,4.75 | 56.25,5 55,3.75 ICSP.4
N$1
  Top 0.254: C1.1 28.25,27.75 28.5,27.5 28.5,26.25 28.25,26 U1.10
N$2
  Top 0.254: U1.9 28.5,25.5 29,26 29,27 30.06,28.06 R11.2
N$3
  Top 0.254: R10.2 30,26 29,25 U1.8
N$4
  Top 0.254: RN1.1 42.84,37.09 43.25,37.5 44.5,37.5 48,41 D0.C
N$5
  Top 0.508: PW.A R14.2
N$6
  Top 0.254: RN1.2 42.25,37.25 46,41 D1.C
N$7
  Top 0.254: RN1.3 41.75,38.75 44,41 D2.C
N$8
  Top 0.254: RN1.4 41.25,40.25 42,41 D3.C
N$9
  Top 0.254: RN1.5 40.75,40.25 40,41 D4.C
N$10
  Top 0.254: RN1.6 40.25,38.75 38,41 D5.C
N$11
  Top 0.254: RN1.7 39.75,37.25 36,41 D6.C
N$12
  Top 0.254: D7.C 34,41 37.5,37.5 38.75,37.5 39.16,37.09 RN1.8
N$13
  Top 0.254: RN2.1 26.84,51.25 27.09,51.5 30.5,51.5 32,53 A8.C
N$14
  Top 0.254: A9.C 30,52.95 29.05,52 26.75,52 26.25,51.5 RN2.2
N$15
  Top 0.254: A10.C 28,53.95 25.75,51.7 RN2.3
N$16
  Top 0.254: A11.C 26,52.7 25.25,51.95 RN2.4
N$17
  Top 0.254: A12.C 24,52.7 24.75,51.95 RN2.5
N$18
  Top 0.254: A13.C 22,53.95 24.25,51.7 RN2.6
N$19
  Top 0.254: RN2.7 23.75,51.38 23.12,52 21,52 20,53 A14.C
N$20
  Top 0.254: A15.C 18,52.95 19.45,51.5 22.91,51.5 23.16,51.25 RN2.8
N$21
  Top 0.508: TX.A R12.2
N$22  (via drill 0.35)
  Top 0.254: R3.1 v14,14 | J2.B5 18.75,8.03 v19.74,9.02
  Bottom 0.254: v14,14 15,13 17.5,13 19,11.5 20,11.5 21,10.5 21,9.5 20.5,9 19.75,9 v19.74,9.02
N$23  (via drill 0.35)
  Top 0.254: J2.A5 15.75,4.75 v15,4 | v20,13 R2.1
  Bottom 0.254: v15,4 14.91,4.09 13.5,4.09 12,5.59 12,14 13.25,15.25 18.75,15.25 20,14 v20,13
N$24
  Top 0.254: RN3.1 42.84,51.34 43,51.5 46.5,51.5 48,53 A0.C
N$25
  Top 0.254: RN3.2 42.25,51.5 42.75,52 45,52 46,53 A1.C
N$26
  Top 0.254: RN3.3 41.75,51.75 44,54 A2.C
N$27
  Top 0.254: RN3.4 41.25,52.25 42,53 A3.C
N$28
  Top 0.254: A4.C 40,52.95 40.75,52.2 RN3.5
N$29
  Top 0.254: A5.C 38,54.08 40.25,51.83 RN3.6
N$30
  Top 0.254: A6.C 36,53 37,52 39.25,52 39.75,51.5 RN3.7
N$31
  Top 0.254: A7.C 34,53 35.5,51.5 38.91,51.5 39.16,51.25 RN3.8
N$32
  Top 0.254: RN4.1 26.84,37.09 27.25,37.5 28.5,37.5 32,41 A16.C
N$33
  Top 0.254: A17.C 30,40.95 26.25,37.2 RN4.2
N$34
  Top 0.254: A18.C 28,40.95 25.75,38.7 RN4.3
N$35
  Top 0.254: A19.C 26,40.95 25.25,40.2 RN4.4
N$36
  Top 0.254: A20.C 24,40.95 24.75,40.2 RN4.5
N$37
  Top 0.254: A21.C 22,40.95 24.25,38.7 RN4.6
N$38
  Top 0.254: RN4.7 23.75,37.25 20,41 A22.C
N$39
  Top 0.254: A23.C 18,41 21.5,37.5 22.75,37.5 23.16,37.09 RN4.8
N$40
  Top 0.254: XTAL1.XA 65.6,23.4 69.35,19.65 72.34,19.65 Y2.3
N$41
  Top 0.254: Y2.1 68.97,20.6 65.67,23.9 XTAL1.XB
N$42
  Top 0.508: RX.A R13.2
N$43
  Top 0.508: U3.3 33.81,10.79 C10.1
N$44
  Top 0.508: C11.2 27.72,13.28 28.08,12.92 U3.1
N$45
  Top 0.254: R6.2 34.93,5.05 CIC_START.A
N$47  (via drill 0.35)
  Top 0.254: S1.4 47.08,9.07 v48,10 | v64,27 64.41,27.41 U5.4
  Bottom 0.254: v48,10 48.5,10.5 55,10.5 64,19.5 v64,27
N$48  (via drill 0.35)
  Top 0.254: R1.1 55.23,9.73 54.67,9.17 v54.17,9.17 | v49,9.41 48.5,8.91 v48.5,7.75 | v48.5,4.5 47.92,3.92 S1.3
  Bottom 0.254: v54.17,9.17 49.24,9.17 v49,9.41 | v48.5,7.75 v48.5,4.5
RESET  (via drill 0.35)
  Top 0.254: C4.2 36.95,28.85 R7.1 38.76,28.59 37.93,27.77 37.93,25.93 36.22,24.22 36.22,18.97 35.75,18.5 v35.75,18.25 | U2.29 47.9,11.1 48,11 52,11 53,10 53,7 | 53,7 53,6.81 ICSP.5 51.94,5.75 v50,5.75 | DI1.A 57.5,8.55 56.7,7.75 53.75,7.75 53,7 | v41,6 41,5 S2.1 S2.2 39.92,8.57 37,11.5 v37,13
  Bottom 0.254: v50,5.75 50,3.25 49.25,2.5 44.25,2.5 41,5.75 v41,6 | v35.75,18.25 35.75,17 37,15.75 v37,13
RST  (via drill 0.35)
  Top 0.254: v37,7 34,7 32,5 31.22,5 SW2.P$5
  Top 0.508: SW2.P$2 SW2.P$5
  Bottom 0.254: v37,7 39.07,7 44.23,1.84 58.88,1.84 66,8.96 66,31.29 77.46,42.75 77.46,76.54 CONNECTOR1.26
RST_SW  (via drill 0.35)
  Top 0.254: U5.3 63.15,27.14 v63,27 | SW2.P$4 34.13,2.55 R6.1 33.74,3.16 33.41,3.49 33.41,5.73 33.68,6 v35.74,6
  Top 0.508: SW2.P$3 SW2.P$4
  Bottom 0.254: v63,27 63,19.07 54.83,10.91 38.91,10.91 35.99,8 35.99,6.25 v35.74,6
RTS
  Top 0.254: R8.2 C4.1 34,28.75 33.75,29 25.66,29 25,28.34 25,25.34 24.16,24.5 U1.4
RX  (via drill 0.35)
  Top 0.254: R11.1 33.44,28.06 v35.5,26 | U2.31 49.5,13.5 48.5,14.5 v48.5,15 | v11,21.75 11,24 10,25 RX.C
  Bottom 0.254: v48.5,15 48.5,16 38.5,26 v35.5,26 35.41,25.91 25.73,25.91 21.32,21.5 12,21.5 11.75,21.75 v11,21.75
SCK_D13  (via drill 0.35)
  Top 0.254: v43.58,10.25 43.58,10.67 40,14.25 v40,16 | U2.17 40.57,19.79 39.92,20.44 v39.92,20.94 40,21.01 40,23 41,24 v42,24 | CMOS4.G 34.72,109.72 v34,109 | v39.75,60.5 48.25,60.5 50,58.75 v50,57 | v42,27 49,34 v49,46
  Bottom 0.254: ICSP.3 52.52,8.75 44.75,8.75 43.58,9.92 v43.58,10.25 | v39.92,20.94 40,20.86 v40,16 | v42,24 v42,27 | v34,109 34,107 31.34,104.34 31.34,98.66 36.04,93.96 36.04,81.64 36.7,80.99 42.26,80.99 43.36,79.89 43.36,76.36 39.75,72.75 v39.75,60.5 | v50,57 50,56 49,55 v49,46
SCL_1
  Top 0.254: R18.1 66.51,23.99 66.1,24.4 XTAL1.SCL 64.7,24.33 63.9,24.33 63.41,23.84 63.41,21.16 65.95,18.62 U4.2
SDA_1
  Top 0.254: R19.1 67.02,26.02 65.9,24.9 XTAL1.SDA 63.9,24.9 63,24 63,21 64.69,19.32 U4.3
TX  (via drill 0.35)
  Top 0.254: R10.1 33.75,26 v34.5,25.25 | v47.5,15 47.5,14.75 48.7,13.55 U2.30 | TX.C 10,22.95 v10,21
  Bottom 0.254: v47.5,15 47.5,16.43 38.83,25.09 34.66,25.09 v34.5,25.25 34.25,25.5 26,25.5 21.5,21 v10,21
U2_A0  (via drill 0.35)
  Top 0.254: CMOS1.DIR 61.28,47.28 v54,40 | v52.75,26 50.75,24 v50.75,23.75 | v43,23.5 43,23 41.37,21.37 v41.37,20.87 | v41.5,15 U2.23
  Bottom 0.254: v54,40 52.25,38.25 52.25,26.5 v52.75,26 | v50.75,23.75 43.25,23.75 v43,23.5 | v41.37,20.87 41.37,15.13 v41.5,15
U2_A1  (via drill 0.35)
  Top 0.254: U2.24 41.69,14.19 v41.5,14 | CMOS2.CK 56.71,98.28 56.1,98.89 53.84,98.89 53.23,98.28 CMOS4.CK 41.28,98.28 v40,97 | v38.84,23.85 41,26.01 41,31 37.5,34.5 15.74,34.5 13.79,36.45 13.79,96.04 14.54,96.78 16.59,96.78 17.29,97.48 CMOS3.CK 17.29,100.7 19.08,102.5 v21.25,102.5 | v34,97.5 33,96.5 v28.5,96.5 | v28.5,104.75 23.53,104.75 v22.78,104
  Bottom 0.254: v41.5,14 40.75,14.75 40.75,20.57 40.72,20.6 40.72,21.98 v38.84,23.85 | v40,97 34.5,97 v34,97.5 | v28.5,96.5 v28.5,104.75 | v22.78,104 21.28,102.5 v21.25,102.5
U2_A2  (via drill 0.35)
  Top 0.254: U2.25 44.7,19.23 44.29,19.63 44.29,20.28 43.9,20.67 43.9,23.85 v43,24.75
  Bottom 0.254: CONNECTOR1.23 68.37,75.87 64.81,75.87 63,74.06 63,54.75 61,52.75 61,51.33 50.19,40.51 50.19,25.19 49.75,24.75 v43,24.75
U2_A3  (via drill 0.35)
  Top 0.254: v39,16 39,13.82 43.32,9.5 43.85,9.5 45.49,11.14 U2.26 | v39,20 39.06,20.06 39.06,22.64 49.66,33.23 49.66,47.41 v49.75,47.5 | CONNECTOR1.49 57,78.97 55.99,77.95 55.99,75.01 v56,75
  Bottom 0.254: v39,16 v39,20 | v56,75 51.5,70.5 51.5,50.5 50.75,49.75 50.75,48.5 v49.75,47.5
U2_A4  (via drill 0.35)
  Top 0.254: U2.27 46.3,11.3 45.75,10.75 45.75,7.25 47,6 49,6 v51,8 | v63,9 63.41,9.41 U4.5 63.41,13.41 v64,14 | R15.2 62,6.1 v62,7
  Bottom 0.254: v63,9 63,7.11 62.89,7 | 62.89,7 58.55,2.66 53.75,2.66 53.75,4.25 53,5 51.91,5 51.16,5.75 51.16,7.84 v51,8 | v64,14 64,18 64.75,18.75 64.75,28.25 63.41,29.59 63.41,73.87 64.99,75.45 69.73,75.45 70.75,76.47 70.75,79.28 69.5,80.53 CONNECTOR1.54 | v62,7 62.89,7
U2_A5  (via drill 0.35)
  Top 0.254: U2.28 47.1,11.43 46.22,10.54 46.22,7.43 47.13,6.52 48.52,6.52 v49.74,7.75 v49.75,7.75 | v64.5,8.79 64.69,8.97 U4.6 64.69,12.69 v65,13 | v62,15 61.48,15.52 v57.9,15.52 | v53.5,25.25 53.5,26.5 52.39,27.61 R17.2 | SW2.P$6 36.55,7.55 v38,9
  Top 0.508: SW2.P$1 SW2.P$6
  Bottom 0.254: v64.5,8.79 64.5,8.04 58.72,2.25 51.5,2.25 50.75,3 50.75,6.25 49.75,7.25 v49.75,7.75 49.75,7.68 49.16,7.09 49.16,3.23 49.02,3.09 45.41,3.09 39.5,9 v38,9 | v65,13 64,13 v62,15 | v57.9,15.52 57.16,16.25 57.16,20.99 53.75,24.4 53.75,25 v53.5,25.25
U2_D2  (via drill 0.35)
  Top 0.254: v53,40 61.55,48.55 CMOS1.A1 74.61,48.55 84.34,58.29 84.34,95.73 70.97,109.11 62.9,109.11 62,110 59.67,110 56.85,107.17 CMOS2.D1 53.47,107.17 52.86,106.56 44.4,106.56 43.79,107.17 CMOS4.D1 26.57,107.17 26.18,107.58 CMOS3.D1 | U2.32 50.3,11.95 50.5,11.75 v51.25,11.75
  Bottom 0.254: v51.25,11.75 54.85,11.75 56.75,13.65 56.75,20.82 51.81,25.76 51.81,38.81 v53,40
U2_D3  (via drill 0.35)
  Top 0.254: U2.1 52.56,14.19 53,13.75 v53.75,13.75 | v52,40 61.83,49.83 CMOS1.A2 75.31,49.83 83.94,58.46 83.94,95.56 71.72,107.78 63.9,107.78 63.86,107.75 58.8,107.75 56.95,105.91 CMOS2.D2 50.9,105.91 50.26,105.27 39.93,105.27 39.29,105.91 CMOS4.D2 26.09,105.91 24.91,107.09 CMOS3.D2
  Bottom 0.254: v53.75,13.75 53.5,14 53.5,23.5 51.41,25.59 51.41,39.41 v52,40
U2_D4  (via drill 0.35)
  Top 0.254: U2.2 50.59,14.99 49.25,16.32 v49.25,17.5 | v79,99.5 79,99.12 83.53,94.59 83.53,58.63 76,51.09 CMOS1.A3 62.34,51.09 v62.25,51 | v60,102.5 59.59,102.09 CMOS2.D3 49.52,102.09 48.91,101.48 45.9,101.48 45.29,102.09 CMOS4.D3 22.66,102.09 21.34,103.41 21.34,105 21.09,105.25 CMOS3.D3
  Bottom 0.254: v79,99.5 77.25,97.75 61.25,97.75 59,100 59,100.75 60,101.75 v60,102.5 59.75,102.25 | v62.25,51 62,51 51,40 51,25.43 53.09,23.34 53.09,18.16 52.43,17.5 v49.25,17.5
U2_D5  (via drill 0.35)
  Top 0.254: v78,100.5 78,99.55 83.13,94.42 83.13,58.8 76.69,52.37 CMOS1.A4 62.6,52.37 v62.51,52.27 | v60.5,100.5 60.17,100.83 CMOS2.D4 50.58,100.83 49.91,100.17 40.16,100.17 v40,100 39.17,100.83 CMOS4.D4 | v51.75,23.25 51.25,22.75 50.75,22.75 50.3,22.3 U2.9 | v32,103 22.75,103 22,103.75 v22,105.75 | v20,106 19.82,106.17 CMOS3.D4
  Bottom 0.254: v78,100.5 76.25,98.75 62.25,98.75 v60.5,100.5 | v62.51,52.27 v62.51,52.26 50.59,40.34 50.59,25.16 51.75,24 v51.75,23.25 | v40,100 40,101 39,102 33,102 v32,103 | v22,105.75 20.25,105.75 v20,106
U2_D6  (via drill 0.35)
  Top 0.254: 66.19,53.8 CMOS1.A5 v71,53.63 77.36,53.63 82.72,58.99 82.72,94.25 75,101.97 v75,102.5 | v70,101.5 69.33,100.83 CMOS2.D5 62,100.83 61.34,101.48 49.73,101.48 49.08,100.83 CMOS4.D5 45.42,100.83 44.81,101.44 21.18,101.44 19.82,100.08 CMOS3.D5 | U2.10 49.5,29.63 54.15,34.28 55.51,34.28 64.25,43.03 68.96,43.03 70.42,44.49 v70.41,44.5
  Bottom 0.254: v75,102.5 74,101.5 v70,101.5 | v70.41,44.5 70.41,53.04 v71,53.63
U2_D7  (via drill 0.35)
  Top 0.254: CMOS1.A6 v70.5,54.91 78.05,54.91 82.31,59.16 82.31,94.09 74,102.4 v74,103.25 | v70,102.5 69.59,102.09 CMOS2.D6 62.91,102.09 61.5,103.5 59,103.5 58.25,102.75 49.25,102.75 48.59,102.09 CMOS4.D6 45.91,102.09 v44,104 | U2.11 48.7,29.4 53.99,34.69 55.34,34.69 64.09,43.44 68.37,43.44 69.43,44.5 v69.5,44.5 | CMOS3.D6 21.09,96.41 v21.5,96
  Bottom 0.254: v74,103.25 73.25,102.5 v70,102.5 | v69.5,44.5 69.5,53.91 v70.5,54.91 | v44,104 44,104.62 42.93,105.69 42.93,109.34 42.27,110 31.71,110 24.59,102.88 24.59,99.09 v21.5,96
U2_D8  (via drill 0.35)
  Top 0.254: CMOS1.A7 v70,56.17 78.7,56.17 81.91,59.38 81.91,93.92 71,104.83 v71,106 | v68,106 67.91,105.91 CMOS2.D7 60.34,105.91 59.67,105.25 51.15,105.25 v50.36,104.46 | U2.12 47.9,29.18 53.82,35.09 55.17,35.09 63.92,43.84 68.02,43.84 68.5,44.32 v68.5,44.5 | CMOS4.D7 44,105.91 | 44,105.91 43.34,105.91 43.12,106.12 40.12,106.12 v40.06,106.06 | v33,104 v27,104 | CMOS3.D7 25,98.89 v25,97 | v44,105.92 44,105.91
  Bottom 0.254: v71,106 v68,106 | v68.5,44.5 68.5,54.67 v70,56.17 | v40.06,106.06 38,104 v33,104 | v25,97 25.5,97.5 25.5,102.5 v27,104 | v50.36,104.46 50.36,104.5 48.94,105.91 v44.01,105.91 v44,105.92
U2_D9  (via drill 0.35)
  Top 0.254: CMOS1.A8 v69.25,57.45 79.35,57.45 81.5,59.59 81.5,93.75 68.08,107.17 CMOS2.D8 59.55,107.17 v58.8,106.43 | U2.13 47.1,28.95 53.65,35.5 55,35.5 63.75,44.25 67.25,44.25 v67.5,44.5 | v51.75,107.22 51.7,107.17 CMOS4.D8 45.08,107.17 43.25,109 v42,109 | CMOS3.D8 26.18,100.17 27,101 34.5,101 35.34,100.17 38.34,100.17 39.5,99 v41,99
  Bottom 0.254: v67.5,44.5 67.5,55.7 v69.25,57.45 | v58.8,106.43 58.5,106.73 52.24,106.73 v51.75,107.22 | v41,99 41,108 v42,109
U2_D10  (via drill 0.35)
  Top 0.254: U2.14 46.3,28.73 53.48,35.91 54.83,35.91 57,38.08 v57,38.5 | 56.03,48.5 CMOS1.G 53.55,48.55 51,46 51,40 52,39 v54.75,39
  Bottom 0.254: v57,38.5 55.25,38.5 v54.75,39
VBUS  (via drill 0.35)
  Top 0.508: J2.A4/B9 14.6,7.65 v13.25,9 | J2.B4/A9 19.4,7.4 20.23,8.23 v21.98,8.23 22.4,8.65 F1.1
  Bottom 0.508: v13.25,9 14.5,7.75 19.5,7.75 19.98,8.23 v21.98,8.23
VCC  (via drill 0.35)
  Top 0.254: R12.1 15.85,13.85 15,13 15,11.4 15.41,10.99 19.24,10.99 20.5,12.25 | U1.7 27.75,24.5 28,24.25 28,23.25 25,20.25 20.5,20.25 18.75,18.5 18.75,13 19.5,12.25 20.5,12.25 | R17.1 54.09,26.41 54.25,26.25 54.25,23.75 50.5,20 50.5,18.62 50.93,18.19 U2.6 | F1.2 21.05,12.8 20.5,12.25
  Top 0.508: R12.1 15.85,24.97 R13.1 15.87,26.98 R14.1 | 53.41,16.59 U2.4 | 53.41,16.59 55,15 57,15 58,14 58,12.61 R16.1 57.5,11.81 DI1.C 58.65,10.35 60,9 60,6 57.73,3.73 | U2.6 52.81,18.19 53.41,17.59 53.41,16.59 | R17.1 54.15,28.14 56.05,28.14 C6.1 56.34,28.25 60.5,28.25 60.6,28.36 U5.1 | U2.18 38.24,18.99 36.75,17.5 | 36.75,17.5 34.73,15.48 28.25,15.48 27.75,14.98 C11.1 26.48,15 25,15 | 57.73,3.73 ICSP.2 | C5.2 65.66,110.35 CMOS2.VCC 68.72,109.72 v69,110 | C3.2 54,46.75 54.53,47.28 CMOS1.VCC 57.28,47.28 60.59,50.59 60.59,57.59 79.5,76.5 CONNECTOR1.27 CONNECTOR1.58 79.5,85 v80,85.5 | CMOS3.VCC 28.71,97.78 29.15,97.35 C7.2 30.5,99.25 v30.43,99.25 | v32.5,109 34.75,111.25 C2.2 47.4,110.09 CMOS4.VCC 51.28,109.72 v52,109 | R7.2 38.76,26.01 36.75,24 36.75,17.5 | 57.73,3.73 56.56,4.9 51.9,4.9 49.66,2.66 46.19,2.66 S1.1 S1.2 43.99,8.07 40.07,12 v38,12 | 57.73,3.73 61.33,3.73 R15.1 61.9,4 v65,4 | F1.2 22.4,14.4 23,15 25,15 | 25,15 25,13 v26,12
  Bottom 0.508: v80,85.5 80,100 70,110 v69,110 68.98,109.98 56.12,109.98 55.14,109 v52,109 | v30.43,99.25 30.43,107.44 32,109 v32.5,109 | v26,12 v38,12 | CONNECTOR1.27 79.5,40.5 71,32 71,8 67,4 v65,4
VDD
  Top 0.254: XTAL1.VDD 65.53,22.9 70.4,18.02 C9.2
VDDO
  Top 0.254: XTAL1.VDDO 58.85,24.4 58.15,25.1 C8.2
VREF2
  Top 0.508: C12.2 71.99,9.49 71.25,8.75 68,8.75 67.22,9.53 U4.8 U4.7 65.95,8.96 65,8 62.5,8 59.85,10.65 R16.2
XTAL_1
  Top 0.254: U2.7 53.51,18.99 53.75,18.75 55.35,18.75 R9.1 56.85,18.9 57.25,18.5 Y1.3
XTAL_2
  Top 0.254: U2.8 53.54,19.79 54.35,20.6 R9.2 56.6,20.6 56.9,20.9 Y1.1

## Text on the board
tPlace: C10 | SA1-SW | SA1-Mode | SNES-ROM-Dumper Rev.1.0 | | | R6 | | | SA1-LED | Reset | CIC-Reset | Copyright © 2022 AkiraEkawa All Right Reserved. | Default-Mode